# Altium PCB PCB_ForestS1STM32.pcbdoc
Units mil, origin at the board's own origin, x right, y up, seen from the top; angles counter-clockwise.
Board outline 3305 x 3225 mil, 2 copper layers (Top Layer, Bottom Layer); 45 components, 58 nets, 207 pads, 149 vias.
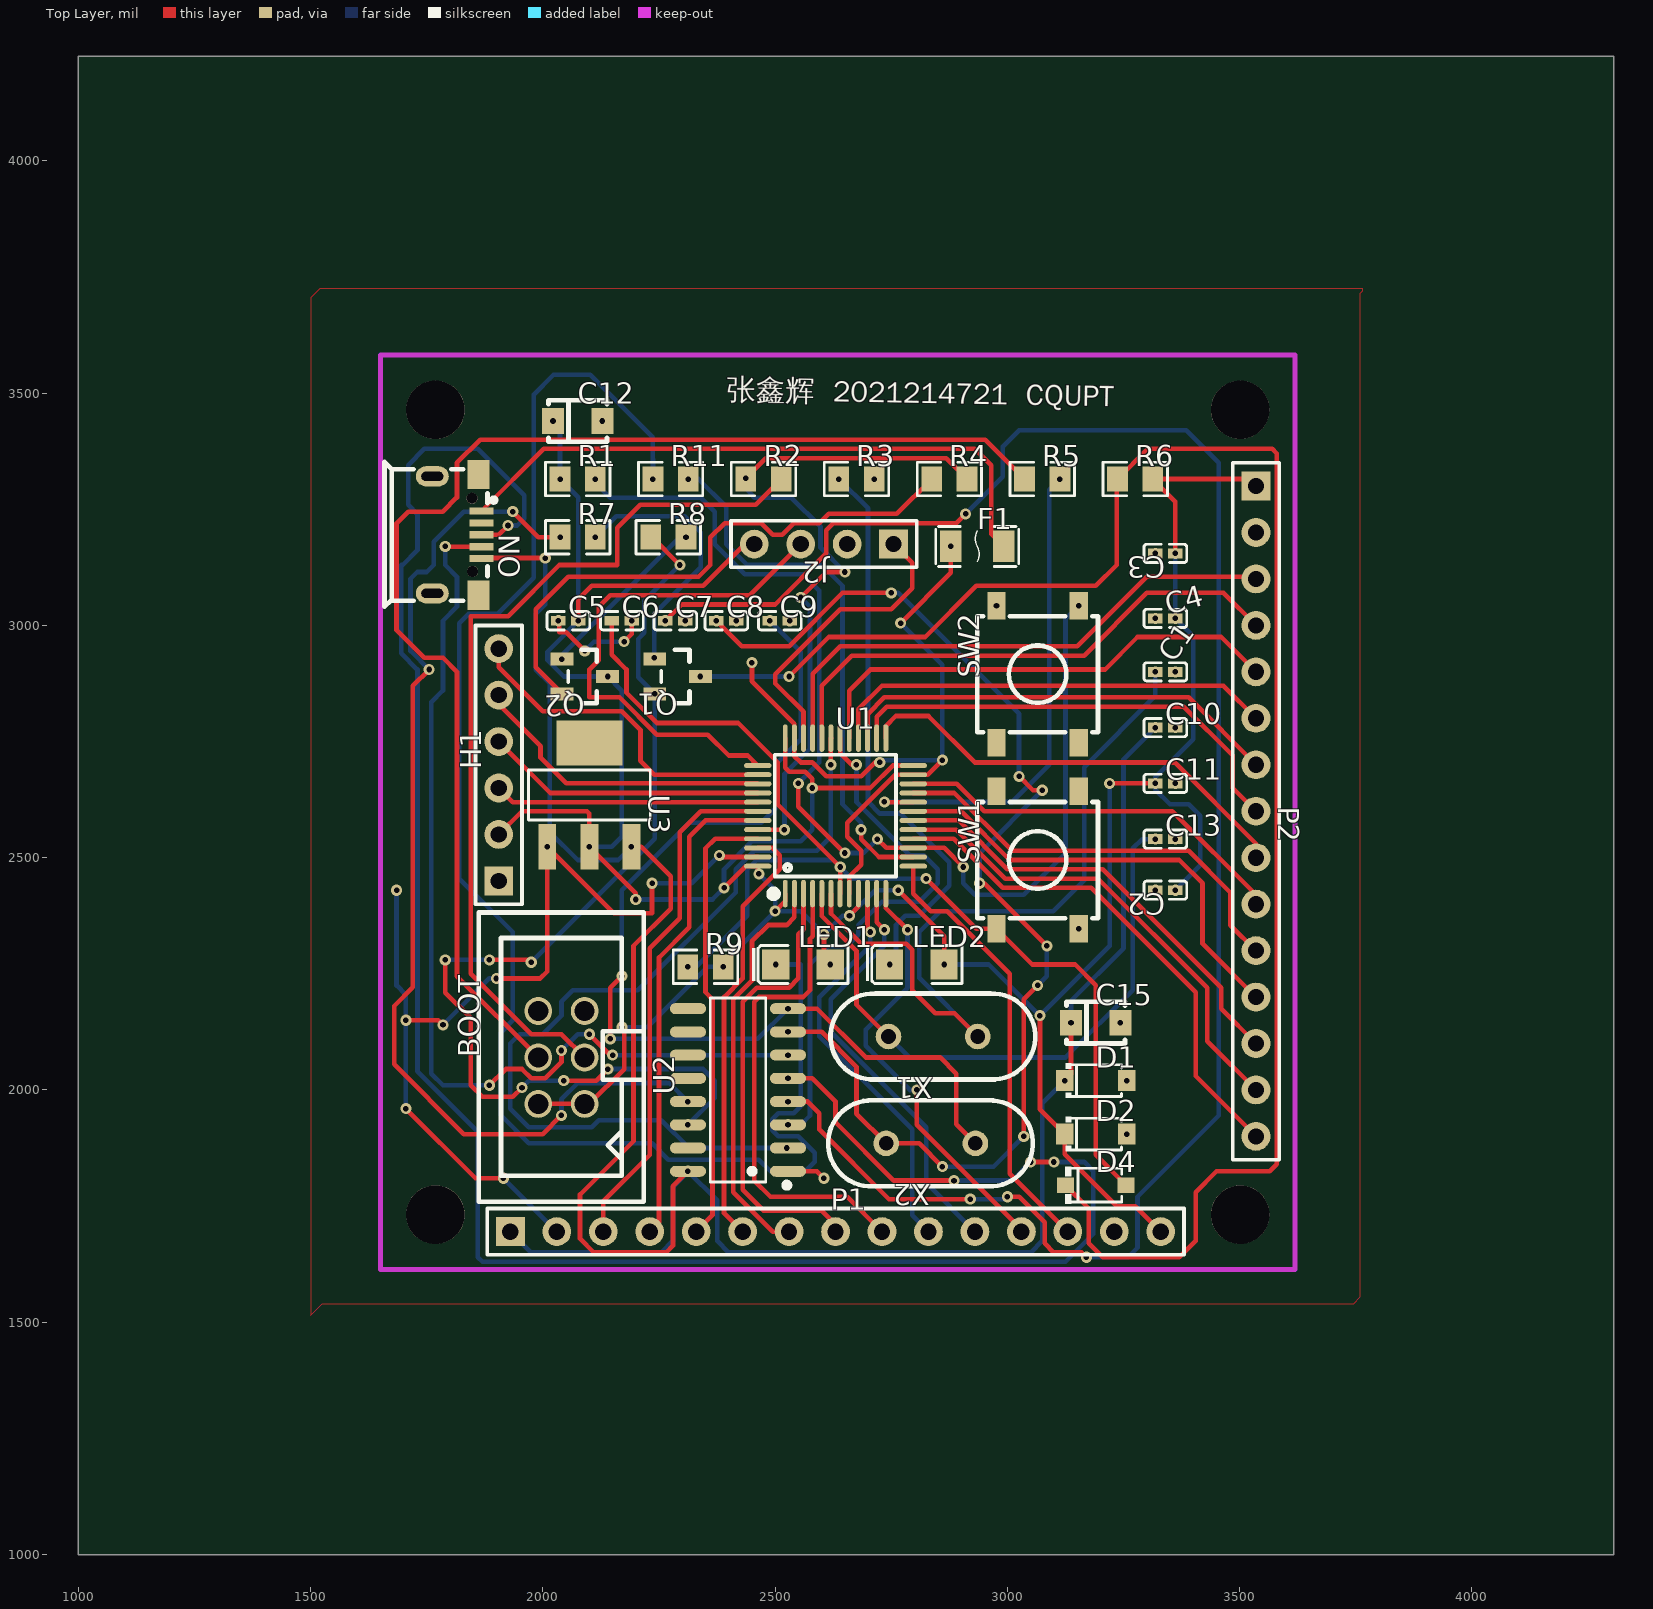
[diagram p0: Top Layer view]
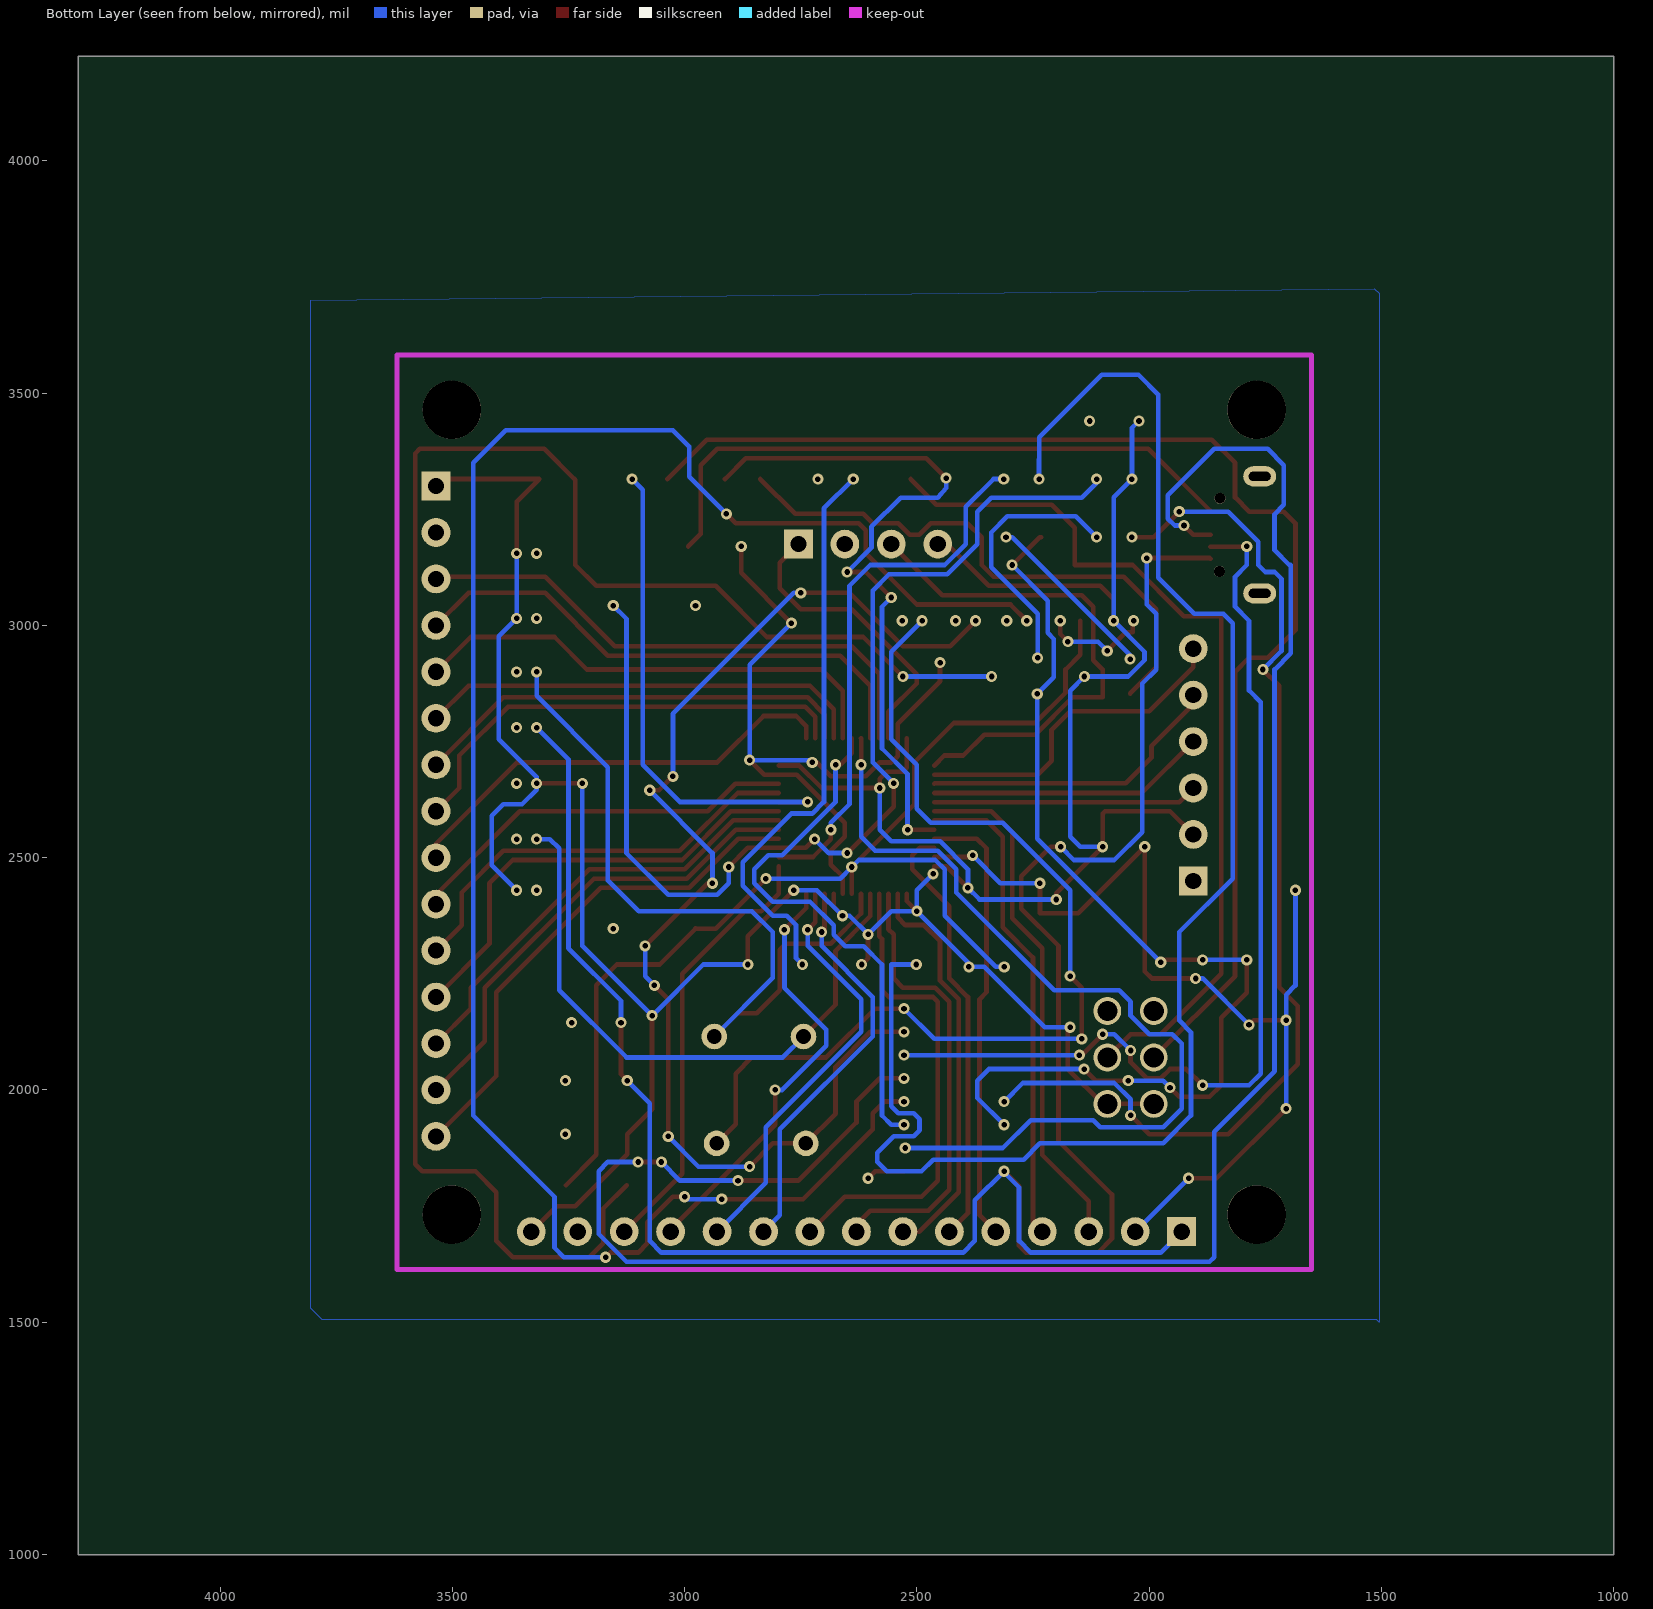
[diagram p1: Bottom Layer view, seen from below]

## Layer stack, top to bottom
Top Layer: signal copper (thickness not stored)
Dielectric: dielectric 12.6, FR-4, Dk 4.8
Bottom Layer: signal copper (thickness not stored)

## Board outline
4305,1000 1000,1000 1000,4225 4305,4225

## Components (designator, comment, footprint, x,y, rotation, side; value= is the part's Value field where it differs from the comment)
BOOT "HDR-IDC-2.54-2X3P" IDC-TH_6P-P2.54_C11214 2040,2070 r90 top
C1 "22pF" C0402 3340,2900 r0 top
C2 "0.1uF" C0402 3340,2430 r180 top
C3 "0.1uF" C0402 3340,3155 r180 top
C4 "0.1uF" C0402 3340,3015 r0 top
C5 "0.1uF" C0402 2054.99,3009.99 r0 top
C6 "0.1uF" C0402 2169.99,3009.99 r0 top
C7 "0.1uF" C0402 2284.99,3009.99 r0 top
C8 "22pF" C0402 2394.99,3009.99 r0 top
C9 "22pF" C0402 2509.99,3009.99 r0 top
C10 "0.1uF" C0402 3340,2780 r0 top
C11 "0.1uF" C0402 3340,2660 r0 top
C12 "22uF" CAP-SMD_L3.2-W1.6 2075,3440 r0 top
C13 "22pF" C0402 3340,2540 r0 top
C15 "22uF" CAP-SMD_L3.2-W1.6 3190,2145 r0 top
D1 "MM1Z12_C115273" SOD-123_L2.8-W1.8-LS3.7-RD 3190,2020 r0 top
D2 "MM1Z12_C115273" SOD-123_L2.8-W1.8-LS3.7-RD 3190,1905 r0 top
D4 "肖特基二极管B130" SOD-123_L2.7-W1.7-LS3.8-RD 3190,1795 r0 top
F1 "F1206HB30V024TM" F1206 2935,3170 r0 top
H1 "HDR-F-2.54_1x6" HDR-F-2.54_1X6 1905,2650 r90 top
J2 "HDR-F-2.54_1x4" HDR-F-2.54_1X4 2605,3175 r180 top
LED1 "11-21/R6C-AR2S2B/2T" LED1206-R-RD 2560,2270 r0 top
LED2 "11-21/R6C-AR2S2B/2T" LED1206-R-RD 2805,2270 r0 top
NO "MICROUSB-5PIN" USB-SMD_5P_MICROUSB-5PIN 1815,3195 r270 top
P1 "HDR-F-2.54_1x15" HDR-F-2.54_1X15 2630,1695 r0 top
P2 "HDR-F-2.54_1x15" HDR-F-2.54_1X15 3535,2600 r270 top
Q1 "2N3904(SOT-23)" SOT-23-3_L2.9-W1.3-P1.90-LS2.4-TR 2290,2890 r180 top
Q2 "2N3904(SOT-23)" SOT-23-3_L2.9-W1.3-P1.90-LS2.4-TR 2090,2890 r180 top
R1 "10kΩ" R0805 2075,3315 r0 top
R2 "10kΩ" R0805 2475,3315 r0 top
R3 "1kΩ" R0805 2675,3315 r0 top
R4 "1kΩ" R0805 2875,3315 r0 top
R5 "10kΩ" R0805 3075,3315 r0 top
R6 "10kΩ" R0805 3275,3315 r0 top
R7 "1kΩ" R0805 2075,3190 r0 top
R8 "1kΩ" R0805 2270,3190 r0 top
R9 "10kΩ" R0805 2350,2265 r0 top
R11 "1kΩ" R0805 2275,3315 r0 top
SW1 "TS-1157-C-B" KEY-SMD_4P-L6.5-W6.2-P4.50--LS8.5-TL 3065,2495 r90 top
SW2 "TS-1157-C-B" KEY-SMD_4P-L6.5-W6.2-P4.50--LS8.5-TL 3065,2895 r90 top
U1 "STM32F103C8T6" LQFP-48_L7.0-W7.0-P0.50-LS9.0-BL 2630,2590 r0 top
U2 "CH340G" SOIC-16_L9.9-W3.9-P1.27-LS6.0-BL 2420,2000 r90 top
U3 "AMS1117-1.2" SOT-223-4_L6.5-W3.5-P2.30-LS7.0-BR 2100,2635 r270 top
X1 "18MHz" CRYSTAL-TH_L11.1-W4.7 2840,2115 r180 top
X2 "12MHz" CRYSTAL-TH_L11.1-W4.7 2835,1885 r180 top

## Footprints (in the part's own frame and the unit in brackets; to place one, negate y for a bottom-side part, rotate by r counter-clockwise, add the part's x,y. Pads: shape width x height; smd on the part's side, far side on the other; paste and mask are expansions set on the pad)
C0402 [mm]
  rect 0.79x0.54 smd: 1(-0.545,0) 2(0.545,0)
  silkscreen extent -1.17,-0.5 1.17,0.5
CAP-SMD_L3.2-W1.6 [mm]
  rect 1.2x1.4 smd: 1(-1.35,0) 2(1.35,0)
  silkscreen extent -1.6,-1.14 1.6,1.14
CRYSTAL-TH_L11.1-W4.7 [mm]
  round 1.4 hole 0.8: 1(-2.44,0) 2(2.44,0)
  silkscreen extent -5.58,-2.35 5.61,2.35
F1206 [mil]
  rect 46.85x68.03 smd: 1(-56.89,0) 2(56.89,0)
  silkscreen extent -89,-43 89,43
HDR-F-2.54_1X4 [mil]
  rect 62x62 hole 35: 1(-150,0)
  round 62 hole 35: 2(-50,0) 3(50,0) 4(150,0)
  silkscreen extent -200,-50 200,50
HDR-F-2.54_1X6 [mil]
  rect 62x62 hole 35: 1(-200,0)
  round 62 hole 35: 2(-100,0) 3(0,0) 4(100,0) 5(200,0) 6(300,0)
  silkscreen extent -250,-50 350,50
HDR-F-2.54_1X15 [mil]
  rect 62x62 hole 35: 1(-700,0)
  round 62 hole 35: 2(-600,0) 3(-500,0) 4(-400,0) 5(-300,0) 6(-200,0) 7(-100,0) 8(0,0) 9(100,0) 10(200,0) 11(300,0) 12(400,0) 13(500,0) 14(600,0) 15(700,0)
  silkscreen extent -750,-50 750,50
IDC-TH_6P-P2.54_C11214 [mil]
  round 60 hole 43.3: 1(-100,-50) 2(-100,50) 3(0,-50) 4(0,50) 5(100,-50) 6(100,50)
  silkscreen extent -311,-177 312,178
KEY-SMD_4P-L6.5-W6.2-P4.50--LS8.5-TL [mm]
  rect 1.5x1 smd: 1(-3.75,2.25) 2(3.75,2.25) 3(-3.75,-2.25) 4(3.75,-2.25)
  silkscreen extent -3.18,-3.3 3.17,3.3
LED1206-R-RD [mm]
  rect 1.485x1.62 smd: 1(1.493,0) 2(-1.492,0)
  silkscreen extent -2.77,-1.04 2.46,1.04
LQFP-48_L7.0-W7.0-P0.50-LS9.0-BL [mm]
  oval 0.27x1.5 smd: 1(-2.75,-4.25) 2(-2.25,-4.25) 3(-1.75,-4.25) 4(-1.25,-4.25) 5(-0.75,-4.25) 6(-0.25,-4.25) 7(0.25,-4.25) 8(0.75,-4.25) 9(1.25,-4.25) 10(1.75,-4.25) 11(2.25,-4.25) 12(2.75,-4.25) 25(2.75,4.25) 26(2.25,4.25) 27(1.75,4.25) 28(1.25,4.25) 29(0.75,4.25) 30(0.25,4.25) 31(-0.25,4.25) 32(-0.75,4.25) 33(-1.25,4.25) 34(-1.75,4.25) 35(-2.25,4.25) 36(-2.75,4.25)
  oval 1.5x0.27 smd: 13(4.25,-2.75) 14(4.25,-2.25) 15(4.25,-1.75) 16(4.25,-1.25) 17(4.25,-0.75) 18(4.25,-0.25) 19(4.25,0.25) 20(4.25,0.75) 21(4.25,1.25) 22(4.25,1.75) 23(4.25,2.25) 24(4.25,2.75) 37(-4.25,2.75) 38(-4.25,2.25) 39(-4.25,1.75) 40(-4.25,1.25) 41(-4.25,0.75) 42(-4.25,0.25) 43(-4.25,-0.25) 44(-4.25,-0.75) 45(-4.25,-1.25) 46(-4.25,-1.75) 47(-4.25,-2.25) 48(-4.25,-2.75)
  silkscreen extent -3.59,-4.46 3.3,3.34
R0805 [mil]
  rect 44.59x54.21 smd: 1(-38.04,0) 2(38.04,0)
  silkscreen extent -69,-36 69,36
SOD-123_L2.7-W1.7-LS3.8-RD [mm]
  rect 0.91x0.84 smd: 1(-1.655,0) 2(1.655,0)
  silkscreen extent -1.65,-1 1.43,1
SOD-123_L2.8-W1.8-LS3.7-RD [mm]
  rect 0.95x1.15 smd: 1(-1.693,0) 2(1.693,0)
  silkscreen extent -1.63,-0.94 1.41,0.94
SOIC-16_L9.9-W3.9-P1.27-LS6.0-BL [mil]
  oval 23.7x77.6 smd: 1(-175,-107.7) 2(-125,-107.7) 3(-75,-107.7) 4(-25,-107.7) 5(25,-107.7) 6(75,-107.7) 7(125,-107.7) 8(175,-107.7) 9(175,107.7) 10(125,107.7) 11(75,107.7) 12(25,107.7) 13(-25,107.7) 14(-75,107.7) 15(-125,107.7) 16(-175,107.7)
  silkscreen extent -211,-111 198,60
SOT-23-3_L2.9-W1.3-P1.90-LS2.4-TR [mm]
  rect 1.25x0.7 smd: 1(1.25,0.95) 2(1.25,-0.95) 3(-1.25,0)
  silkscreen extent -0.65,-1.46 0.9,1.46
SOT-223-4_L6.5-W3.5-P2.30-LS7.0-BR [mm]
  rect 2.47x0.98 smd: 1(2.835,-2.3) 2(2.835,0) 3(2.835,2.3)
  rect 2.47x3.6 smd: 4(-2.835,0)
  silkscreen extent -1.37,-3.33 1.37,3.33
USB-SMD_5P_MICROUSB-5PIN [mm]
  rect 0.4x1.3 smd: 1(-1.3,1.345) 2(-0.65,1.345) 3(0,1.345) 4(0.65,1.345) 5(1.3,1.345)
  rect 1.6x1.2 smd: 6(3.3,1.185) 7(-3.3,1.185)
  oval 1.1x1.8 hole 0.5 slot 1.2 at 90 deg: 8(3.2,-1.345) 9(-3.2,-1.345)
  round 0.6 hole 0.6 unplated: ""(-2,0.825) ""(2,0.855)
  silkscreen extent -3.99,-3.96 3.93,2.14

## Free pads (board coordinates)
  round 125.98 hole 125.98 unplated: ""(1768.7,1731.77) ""(1768.7,3464.05) ""(3500.98,1731.77) ""(3500.98,3464.05)

## Via types
v1: diameter 24, hole 12, Top Layer to Bottom Layer, tented both sides, 149 vias

## Nets (pads, with @x,y where several pads share a name; then routed paths per layer and width w, separated by ;. In a path a pad name is that pad's centre, name@x,y a point inside that pad or via, vN(x,y) a via of type N, cw(c..) or ccw(c..) an arc to the next point about the centre after c; other vN are vias at no path point)
+5V: C10.1 C15.1 D1.1 NO.5 P1.1 U2.16 U3.3 | length 4968.9
  Top Layer w10: NO.5@1867.95,3143.82 1869.13,3145 v1(2005,3145) ; v1(2190.55,2523.39) 2211.6,2523.4 2275,2460 2275,2390 2195,2310 2195,1890 2080,1775 2080,1680 2110,1650 2265,1650 2280,1665 2280,1792.7 v1(2312.3,1825) ; v1(3123.37,2020) 3136.84,2033.48 v1(3136.85,2145)
  Bottom Layer w10: P1.1 1975,1650 2255,1650 2280,1675 2280,1790 2312.3,1822.3 v1(2312.3,1825) 2375,1762.3 2375,1675 2400,1650 3050,1650 3075,1675 3075,1971.6 v1(3123.37,2020) ; v1(2005,3145) 2005,3045 1985,3025 1985,2905 2015,2875 2015,2555 2075,2495 2162.2,2495 v1(2190.55,2523.39) ; v1(3136.85,2145) 3136.8,2191.8 3250,2305 3250,2711.5 v1(3318.54,2780)
  other v1: 3123.37,2020
BOOT0: R2.1 R4.2 U1.44 | length 1556.9
  Top Layer w10: R2.1 v1(2437,3317) 2480,3360 2868,3360 R4.2 ; U1.44 v1(2520,2560) ; v1(2555,3060) 2610,3115 v1(2650,3115)
  Bottom Layer w10: v1(2437,3317) 2437,3295.84 2455,3275 2535,3275 2597.7,3212.3 2597.7,3167.3 v1(2650,3115) ; v1(2520,2560) 2520,2680 2575,2735 2575,3040 v1(2555,3060)
  other v1: 2555,3060
BOOT1: R5.2 U1.20 | length 1075
  Top Layer w10: v1(2735,2620) U1.20
  Bottom Layer w10: v1(2735,2620) 3010,2620 3090,2700 3090,3291.96 v1(3113.04,3315)
BOOT_3: BOOT.3 R2.2 | length 1926.7
  Top Layer w10: BOOT.3 2040,2120 1975,2120 1845,2250 1845,3020 1925,3020 2035,3130 2160,3130 2160,3210 2210,3260 2458.04,3260 R2.2
BOOT_4: BOOT.4 R5.1 | length 2805.2
  Top Layer w10: BOOT.4 1815,2245 1815,2900 1785,2930 1745,2930 1685,2990 1685,3220 1710,3245 1784.6,3245 1815,3275.4 1815,3350 1865,3400 2952,3400 R5.1
DTR: R7.1 U2.13 | length 2308.9
  Top Layer w10: v1(1755,2905) 1720,2870 1720,2220.8 1680,2180.8 1680,2055 1830,1905 1999.8,1905 v1(2040,1945.17) ; v1(1935,3245) 1990,3190 v1(2036.95,3190)
  Bottom Layer w10: v1(1755,2905) 1715,2945 1715,3100 1730,3115 1750,3115 1765,3130 1765,3180 1830,3245 v1(1935,3245) ; v1@2040,1940 2040,1980 2075,2015 2272.3,2015 v1(2312.3,1975)
GND: BOOT.5 BOOT.6 C1.2 C2.2 C3.2 C4.1 C5.1 C6.2 C7.2 C8.2 C9.2 C10.2 C11.2 C12.2 C13.2 C15.2 D1.2 D2.2 F1.1 H1.1 J2.2 P1.2 P1.14 P2.2 R3.2 SW1.3 SW2.2 U1.8 U1.23 U1.35 U1.47 U2.1 U3.1 | length 4031.1
  Top Layer w10: v1(1705,1960) 1855,1810 v1(1915,1810) ; v1(1705,2150) 1775,2150 v1(1785,2140) ; v1(1900,2240) 1994.45,2240 2009.45,2255 U3.1 2152.84,2380 2235,2380 v1(2235,2445) ; v1(2033.54,3009.99) 2035,3008.53 2035,2985 2050,2985 v1(2090,2945) ; v1(2175,2965) 2191.45,2981.45 v1(2191.45,3009.99) ; v1(2380,2505) 2383.58,2501.42 U1.47 ; v1(2450,2920) 2450,2880 2541.4,2788.6 U1.35 2541.4,2718.6 2555,2705 2580,2705 2610,2675 2685,2675 2715,2705 v1(2725,2705) ; U2.1 2590,1825 v1(2605,1810) ; U1.8 2659.5,2459.5 2685,2485 2685,2515 2655,2545 2655,2575 2758.6,2678.6 U1.23 2828.58,2678.58 v1(2860,2710) ; v1(2770,3005) 2878.11,3113.11 v1(2878.11,3170)
  Bottom Layer w10: v1(1685,2430) 1685,2225 1705,2205 v1(1705,2150) v1(1705,1960) ; v1(1785,2140) 1885,2240 v1(1900,2240) ; v1(1915,1810) P1.2 ; v1(2090,2945) 2110,2965 v1@2170,2965 ; v1(2235,2445) 2320,2445 v1(2380,2505) ; v1(2725,2705) 2730,2710 v1(2860,2710) 2860,2915 v1(2770,3005)
  other v1: 3256.63,1905 3256.63,2020 3243.15,2145 3153.58,2347.36 3318.54,2430 2009.45,2523.39 3361.46,2540 3361.46,2660 3361.46,2780 3361.46,2900 2306.45,3009.99 2416.45,3009.99 2531.45,3009.99 3318.54,3015 2976.41,3042.64 3318.54,3155 2713.04,3315 2128.15,3440
NO_1: F1.2 NO.1 | length 1353.1
  Top Layer w10: NO.1@1867.9,3246.2 2001.8,3380 2930,3380 2965,3345 2965,3196.9 F1.2
NRST: C6.1 D4.2 R9.1 SW1.1 U1.7 | length 2494.5
  Top Layer w10: C6.1 2148.5,2936.5 2180,2905 2180,2855 2245,2790 2420,2790 2505,2705 2505,2615 v1(2640,2480) 2640,2422.84 U1.7 ; v1(2825,2455) 2932.64,2347.36 SW1.1 ; SW1.1 3053.8,2270 3145.6,2270 3189.9,2225.6 3190,1860.2 D4.2
  Bottom Layer w10: v1(2311.95,2265) 2330,2265 2440,2375 2440,2475 2460,2495 2625,2495 v1(2640,2480) 2665,2455 v1(2825,2455)
PA0: P1.10 U1.10 | length 873.1
  Top Layer w10: U1.10 2698.9,2346.1 v1(2705,2340)
  Bottom Layer w10: v1(2705,2340) 2705,2310 2595,2200 2595,2115 2795,1915 2795,1730 P1.10
PA1: P1.11 U1.11 | length 910.5
  Top Layer w10: U1.11 2718.58,2361.42 v1(2735,2345)
  Bottom Layer w10: v1(2735,2345) 2735,2310 2620,2195 2620,2125 2825,1920 2825,1800 P1.11
PA2: P1.12 U1.12 | length 931.9
  Top Layer w10: U1.12 2738.27,2391.73 v1(2785,2345) ; v1(2805,2000) 2805,1925 3030,1700 P1.12
  Bottom Layer w10: v1(2785,2345) 2785,2220 2695,2130 2695,2095 2790,2000 v1(2805,2000)
PA3: P1.13 U1.13 | length 945
  Top Layer w10: U1.13 2797.3,2422.7 2835,2385 2870,2385 3005,2250 3005,1820 P1.13
PA4: R11.2 U1.14 | length 1164
  Top Layer w10: v1(2685,2560) 2685,2540 2723.6,2501.4 U1.14
  Bottom Layer w10: v1(2313.04,3315) 2335,3315 2395,3255 2395,3175 2440,3130 2600,3130 2645,3085 2645,2615 2685,2575 v1(2685,2560)
PA5: R1.2 SW2.4 U1.15 | length 2391.5
  Top Layer w10: v1(2550,2660) 2550,2610 v1(2650,2510) ; v1(2720,2540) 2738.9,2521.1 U1.15 2863.9,2521.1 v1(2905,2480)
  Bottom Layer w10: v1(2113.04,3315) 2113,3307 2145,3275 2340,3275 2370,3245 2370,3175 2435,3110 2560,3110 2595,3075 2595,2705 v1(2550,2660) ; v1(2650,2510) 2690,2510 v1(2720,2540) ; v1(2905,2480) 2905,2445 2930,2420 3035,2420 3125,2510 3125,3014 v1(3153.59,3042.63)
PA6: P2.15 U1.16 | length 1108.6
  Top Layer w10: U1.16 2884.2,2540.8 2990,2435 3180,2435 3405,2210 3405,2030 P2.15
PA7: P2.14 U1.17 | length 1037.2
  Top Layer w10: U1.17 2889.5,2560.5 2995,2455 3195,2455 3430,2220 3430,2105 P2.14
PA8: P2.5 U1.29 | length 1056.6
  Top Layer w10: U1.29 2659.53,2859.53 2705,2905 3210,2905 3280,2975 3460,2975 P2.5
PA9: U1.30 U2.3 | length 1162.6
  Top Layer w10: U1.30 2639.8,2725.2 2665,2700 v1(2675,2700)
  Bottom Layer w10: v1(2527.7,1925) 2555,1925 2575,1945 2575,2270 2614.5,2309.5 2654.4,2309.5 2679.2,2334.1 2679.2,2354.2 2730,2405 2810,2405 2850,2445 2850,2475 2820,2505 2790,2505 2675,2620 v1(2675,2700)
PA10: U1.31 U2.2 | length 1916.2
  Top Layer w10: v1(2620,2700) 2620,2757.16 U1.31
  Bottom Layer w10: v1(2525,1875) 2315,1875 2255,1935 2120,1935 2105,1920 1970,1920 1930,1960 1930,2100 1950,2120 2000,2120 2040,2160 2040,2190 2064.5,2214.5 2204.5,2214.5 2415,2425 2415,2475 2455,2515 2590,2515 2620,2545 v1(2620,2700)
PA11: P2.4 U1.32 | length 1159.3
  Top Layer w10: U1.32 2600.47,2870.47 2665,2935 3165,2935 3300,3070 3465,3070 P2.4
PA12: P2.3 U1.33 | length 1181.4
  Top Layer w10: U1.33 2580.8,2895.8 2640,2955 3150,2955 3300,3105 3530,3105 P2.3
PA13: J2.1 U1.34 | length 646.2
  Top Layer w10: U1.34 2561.1,2813.9 2500,2875 2500,2895 2640,3035 2750,3035 2795,3080 2795,3135 J2.1
PA14: J2.3 U1.37 | length 1117.6
  Top Layer w10: U1.37 2440.9,2720 2400,2720 2355,2765 2245,2765 2165,2845 2100,2845 2100,2905 2120,2925 2120,3040 2145,3065 2445,3065 J2.3
PA15: H1.6 U1.38 | length 732.4
  Top Layer w10: H1.6 1905,2910 2000,2815 2170,2815 2210,2775 2210,2708.6 2240,2678.6 U1.38
PB0: P2.13 U1.18 | length 963
  Top Layer w10: U1.18 2894.8,2580.2 3000,2475 3205,2475 3460,2220 3460,2175 P2.13
PB1: P2.12 U1.19 | length 979.5
  Top Layer w10: U1.19 2900.2,2599.8 3005,2495 3370,2495 3420,2445 3420,2315 P2.12
PB3: H1.5 U1.39 | length 663.2
  Top Layer w10: H1.5 1905,2830 1995,2740 1995,2715 2050,2660 2461.6,2660 U1.39
PB4: H1.4 U1.40 | length 603.6
  Top Layer w10: H1.4 2015.79,2639.21 U1.40
PB5: H1.3 U1.41 | length 570.3
  Top Layer w10: H1.3 1935.47,2619.53 U1.41
PB6: P1.3 U1.42 | length 1114.6
  Top Layer w10: P1.3 2130,1760 2230,1860 2230,2305 2295,2370 2295,2555 2339.8,2599.8 U1.42
PB7: P1.4 U1.43 | length 1047.5
  Top Layer w10: P1.4 2250,1715 2250,2285 2315,2350 2315,2545 2350.2,2580.2 U1.43
PB8: P1.5 U1.45 | length 967
  Top Layer w10: P1.5 2365,1730 2365,2195 2350,2210 2350,2520 2370.8,2540.8 U1.45
PB9: P1.6 U1.46 | length 930.2
  Top Layer w10: P1.6 2390,1735 2390,2200 2430,2240 2430,2395 2510,2475 2510,2505 2493.9,2521.1 U1.46
PB10: P2.11 U1.21 | length 919.2
  Top Layer w10: U1.21 2885.8,2639.2 3010,2515 3390,2515 3480,2425 3480,2355 P2.11
PB11: P2.10 U1.22 | length 856.7
  Top Layer w10: U1.22 2891.1,2658.9 2950,2600 3355,2600 3535,2420 P2.10
PB12: P2.9 U1.25 | length 975.6
  Top Layer w10: U1.25 2738.3,2783.3 2760,2805 2830,2805 2930,2705 3360,2705 3535,2530 P2.9
PB13: P2.8 U1.26 | length 1005.8
  Top Layer w10: U1.26 2718.58,2803.58 2740,2825 3380,2825 3485,2720 3485,2650 P2.8
PB14: P2.7 U1.27 | length 962.7
  Top Layer w10: U1.27 2698.9,2808.9 2735,2845 3390,2845 P2.7
PB15: P2.6 U1.28 | length 967.7
  Top Layer w10: U1.28 2679.21,2819.21 2730,2870 3465,2870 P2.6
PC13: P1.7 U1.2 | length 875.8
  Top Layer w10: P1.7 2495,1695 2410,1780 2410,2195 2450,2235 2450,2320 2485,2355 2525,2355 2541.4,2371.4 U1.2
PC14: P1.8 U1.3 | length 979.1
  Top Layer w10: U1.3 2561.1,2346.1 2550,2335 2550,2240 2530,2220 2460,2220 2430,2190 2430,1785 2475,1740 2600.1,1740 2630,1710.1 P1.8
PC15: P1.9 U1.4 | length 1046
  Top Layer w10: U1.4 2580.8,2330.8 2575,2325 2575,2215 2560,2200 2465,2200 2455,2190 2455,1805 2490,1770 2655,1770 P1.9
PD0: C13.1 U1.5 X1.2 | length 1333.7
  Top Layer w10: U1.5 2600.5,2374.5 2675,2300 2675,2183.9 X1.2
  Bottom Layer w10: X1.2 2788.9,2070 3125,2070 3270,2215 3270,2520 3290,2540 v1(3318.54,2540)
PD1: C1.1 U1.6 X1.1 | length 1710.2
  Top Layer w10: U1.6 2620.2,2379.8 2685,2315 2782,2315 2795,2302 2795,2215 2845,2165 2886.1,2165 X1.1
  Bottom Layer w10: X1.1 2810,2241.1 2810,2340 2855,2385 3099,2385 3165,2451 3165,2695 3318.5,2848.5 v1(3318.54,2900)
Q1_2: Q1.2 R7.2 | length 571.6
  Bottom Layer w10: v1(2113.04,3190) 2158,3235 2305,3235 2340,3200 2340,3125 2240,3025 v1(2240,2930)
Q1_3: D4.1 Q1.3 R6.1 | length 3792.7
  Top Layer w10: v1(2530,2890) 2615,2975 2823.3,2975 2933.3,3085 3190,3085 3235,3130 3235,3313 R6.1 3302,3380 3570,3380 3580,3370 3580,1840 3565,1825 3450,1825 3405,1780 3405,1675 3370,1640 3205,1640 3175,1670 3175,1744.8 D4.1
  Bottom Layer w10: v1(2339.2,2890) v1(2530,2890)
Q2_1: Q2.1 R4.1 | length 1229
  Top Layer w10: Q2.1 2040.8,2854.2 1985,2910 1985,3035 2055,3105 2335,3105 2360,3130 2360,3190 2391.2,3220 2470,3220 2495,3195 2515,3195 2540,3220 2595,3220 2615,3240 2762,3240 R4.1
Q2_2: Q2.2 R8.2 | length 380.9
  Bottom Layer w10: v1(2040.8,2927.4) 2040.8,2935.8 2295,3190 v1(2308.04,3190)
R3_1: LED2.2 R3.1 | length 1240.9
  Bottom Layer w10: v1(2636.95,3315) 2700,3252 2700,2620 2725,2595 2770,2595 2875,2490 2875,2440 2810,2375 2780,2375 2760,2355 2760,2283.8 v1(2746.24,2270)
R11_1: LED1.2 R11.1 | length 3451.1
  Bottom Layer w10: v1(2236.95,3315) 2236.2,3405 2101.6,3539.6 2022.9,3539.8 1980,3496.9 1980,3102.4 1902.6,3025 1840,3025 1820,3005 1820,2455 1935,2340 1935,2149.6 1910,2124.6 1910,1945 1970,1885 2235,1885 2270,1850 2465,1850 2490,1825 2565,1825 2585,1845 2585,1865 2550,1900 2506.8,1900 2494.2,1913.1 2494.2,1936.6 2507,1949.5 2540,1950 2555,1965 2555,2270 v1(2501.24,2270)
RTS: Q1.1 R8.1 U2.14 | length 2274.6
  Top Layer w10: v1(1790,2280) 1790,2209.3 1845,2155 1845,2010 1870,1985 1935,1985 v1(1955,2005) ; v1(1885,2280) 1970,2280 v1(1975,2275) ; v1(2045,2020) 2115,2020 v1(2140,2045) ; R8.1 2235,3190 v1(2295,3130)
  Bottom Layer w10: v1(1790,2280) v1(1885,2280) ; v1(1955,2005) 1970,2020 v1(2045,2020) ; v1(1975,2275) 2240.8,2540.8 v1(2240.8,2852.6) 2205,2888.4 2205,2970.7 2218.4,2984.1 2218.4,3053.4 v1(2295,3130) ; v1(2140,2045) 2345,2045 2370,2020 2370,1982.7 v1(2312.3,1925)
U2_4: C7.1 U2.4 | length 4170.5
  Top Layer w10: v1(2263.53,3009.99) 2298.5,3045 2500,3045 2610,3155 2610,3205 2625,3220 2890,3220 v1(2910,3240) ; v1(2527.7,1975) 2570,1975 2595,1950 2595,1915 2745,1765 v1(2920,1765) ; v1(3000,1770) 3025,1770 3080,1715 3080,1670 3100,1650 3160,1650 v1(3170,1640)
  Bottom Layer w10: v1(2910,3240) 2990,3320 2990,3385 3025,3420 3385,3420 3455,3350 3455,1945 3280,1770 3280,1660 3260,1640 v1(3170,1640) ; v1(2920,1765) 2995,1765 v1(3000,1770)
U2_5: NO.3 U2.5 | length 4548.9
  Top Layer w10: NO.3@1867.9,3195 1905,3195 v1(1925,3215) ; v1(2527.7,2025) 2580,2025 2630,1975 2630,1930 2755,1805 v1(2885,1805) ; v1(3050,1845) v1(3100,1845)
  Bottom Layer w10: v1(1925,3215) 1945,3215 1960,3230 1960,3280 1860,3380 1745,3380 1710,3345 1710,3260 1730,3239.5 1730,3161.9 1698.1,3130 1695,3130 1695,2940 1730,2905 1730,2040 1860,1910 1860,1640 1870,1630 3125,1630 3185,1690 3185,1825 3165,1845 v1(3100,1845) ; v1(2885,1805) 3010,1805 v1(3050,1845)
U2_6: NO.4 U2.6 | length 2119.5
  Top Layer w10: v1(1790,3170) NO.4@1867.9,3169.4 ; v1(1885,2010) 1920,2045 1955,2045 1975,2025 2005,2025 2040,2060 v1(2040,2085) ; v1(2100,2120) 2145,2075 v1(2150,2075)
  Bottom Layer w10: v1(1790,3170) 1790,3130 1815,3105 1815,3040 1785,3010 1785,2860 1760,2835 1760,2035 1785,2010 v1(1885,2010) ; v1(2040,2085) 2075,2120 v1(2100,2120) ; v1(2150,2075) v1(2527.7,2075)
U2_7: C8.1 U2.7 X2.2 | length 2628.1
  Top Layer w10: v1(2373.53,3009.99) 2428.5,2955 2530,2955 2645,3070 v1(2750,3070) ; v1(2527.7,2125) 2600,2125 2675,2050 2675,1948.94 X2.2 2810,1885 v1(2860,1835) ; v1(2940,2445) 2950,2445 v1(3085,2310) ; v1(3025,2675) 3055,2645 v1(3075,2645) ; v1(3035,1900) 3035,2195 v1(3065,2225)
  Bottom Layer w10: v1(2750,3070) 2765,3070 3025,2810 v1(3025,2675) ; v1(2860,1835) 2970,1835 v1(3035,1900) ; v1(2940,2445) 2940,2510 v1(3075,2645) ; v1(3065,2225) 3085,2245 v1(3085,2310)
U2_8: C9.1 U2.8 X2.1 | length 2185.1
  Top Layer w10: v1(2145,2110) 2145,2220 v1(2170,2245) ; v1(2527.7,2175) 2590,2175 2695,2070 2855,2070 2890,2035 2890,1926.06 X2.1
  Bottom Layer w10: v1(2145,2110) 2462.7,2110 v1(2527.7,2175) ; v1(2170,2245) 2170,2430 2315,2575 2470,2575 2500,2605 2500,2700 2555,2755 2555,2943.5 v1(2488.53,3009.99)
VCC: BOOT.1 BOOT.2 C2.1 C3.1 C4.2 C5.2 C11.1 C12.1 D2.1 H1.2 J2.4 LED1.1 LED2.1 P1.15 P2.1 Q2.3 R1.1 R6.2 R9.2 U1.1 U1.9 U1.24 U1.36 U1.48 U3.2 | length 7438.3
  Top Layer w10: H1.2 1955,2600 2095,2600 2100,2595 v1(2100,2523.39) 2200,2423.39 v1(2200,2410) ; BOOT.2 BOOT.1 2100,1970 2175,2045 2175,2135 v1(2170,2135) ; C5.2 2076.5,3056.5 2105,3085 2345,3085 2435,3175 J2.4 ; v1(2390,2435) 2436.73,2481.73 U1.48 2462.68,2467.32 v1(2465,2465) ; v1(2500,2385) 2521.73,2406.73 U1.1 ; U1.36 2521.7,2693.3 2530,2685 2565,2685 2580,2670 v1(2580,2650) 2705,2650 2753.3,2698.3 U1.24 ; v1(2605,2335) 2605,2283.76 v1(2618.76,2270) ; v1(2660,2375) 2679.21,2394.21 U1.9 ; v1(2765,2430) 2863.76,2331.24 v1(2863.76,2270) ; v1(3070,2160) 3070,1958.37 D2.1 3123.37,1861.63 3190,1795 3235,1750 3275,1750 P1.15 ; v1(3220,2660) v1(3318.54,2660) ; v1(3361.47,3155) 3361.47,3266.58 R6.2 3520,3315 P2.1
  Bottom Layer w10: v1(2021.85,3440) 2036.95,3424.89 v1(2036.95,3315) 2076.45,3275.5 2076.45,3009.99 2010,2943.54 2010,2925 2045,2890 v1(2139.2,2890) 2170,2859.2 2170,2545 2148.39,2523.39 v1(2100,2523.39) ; v1(2170,2135) 2225,2135 2355,2265 v1(2388.04,2265) ; v1(2200,2410) 2365,2410 v1(2390,2435) 2390,2475 2450,2535 2555,2535 2580,2560 v1(2580,2650) ; v1(2388.04,2265) 2388.04,2273.04 v1(2500,2385) ; v1(2465,2465) 2500,2430 v1(2500,2385) ; v1(2765,2430) 2715,2430 v1(2660,2375) 2645,2375 v1(2605,2335) 2555,2385 v1(2500,2385) ; v1(2863.76,2270) 2960,2270 v1(3070,2160) 3220,2310 v1(3220,2660) ; v1(3361.47,2430) 3415,2483.53 3415,2590 3390,2615 3350,2615 3318.54,2646.46 v1(3318.54,2660) 3318.54,2673.54 3400,2755 3400,2976.46 v1(3361.46,3015) v1(3361.47,3155)
  other v1: 2076.45,3009.99
pads on no net: NO. NO.2 NO.6 NO.7 NO.8 NO.9 SW1.2 SW1.4 SW2.1 SW2.3 U2.9 U2.10 U2.11 U2.12 U2.15 U3.4

## Polygon pours and split planes (outlines as drawn)
GND on Bottom Layer (solid): 1515,3725 1505,3715 1505,1500 1510,1505 3780,1505 3805,1530 3805,3700
GND on Top Layer (solid): 1520,3725 1500,3705 1500,1515 1525,1540 3745,1540 3760,1555 3760,3715 3765,3720 3765,3725

## Silkscreen, mask and mechanical layers (free items; w line width, h text height)
Top Overlay:
  text "张鑫辉  2021214721  CQUPT" at 2395,3470 h80 r359